# Altium PCB PCB1.PcbDoc
Units mil, origin at the board's own origin, x right, y up, seen from the top; angles counter-clockwise.
Board outline 1675 x 1025 mil, 2 copper layers (Top Layer, Bottom Layer); 28 components, 51 nets, 158 pads, 51 vias.
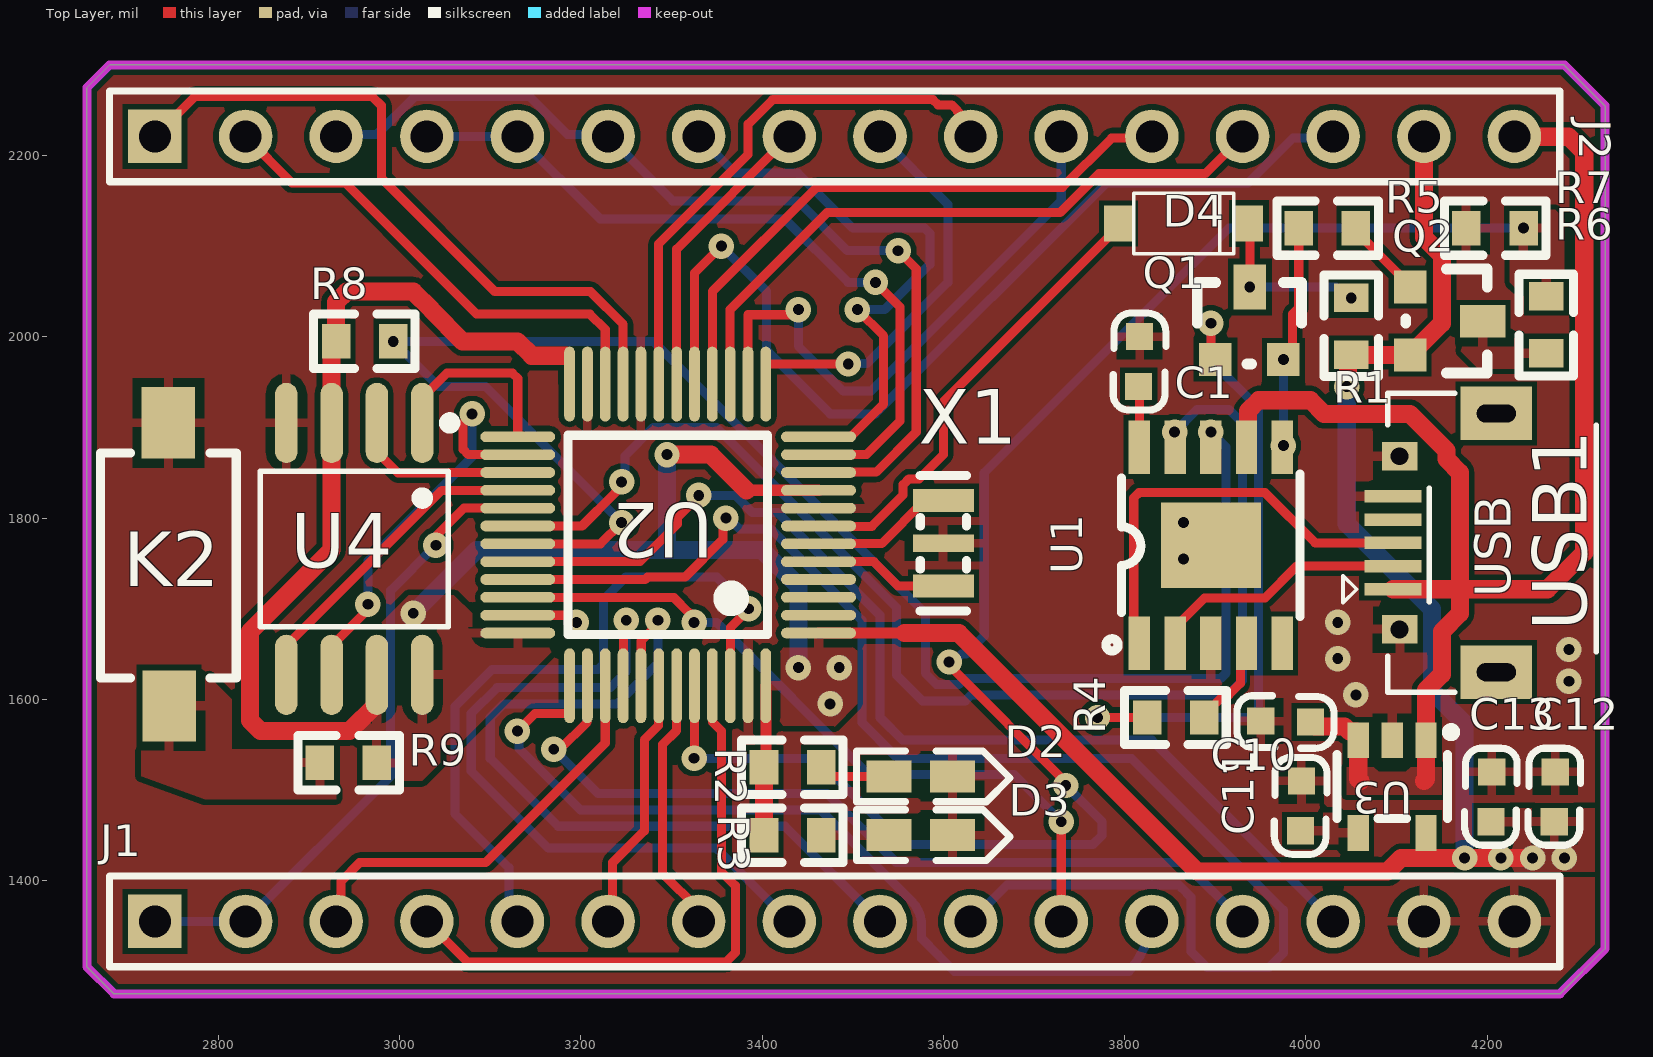
[diagram p0: Top Layer view]
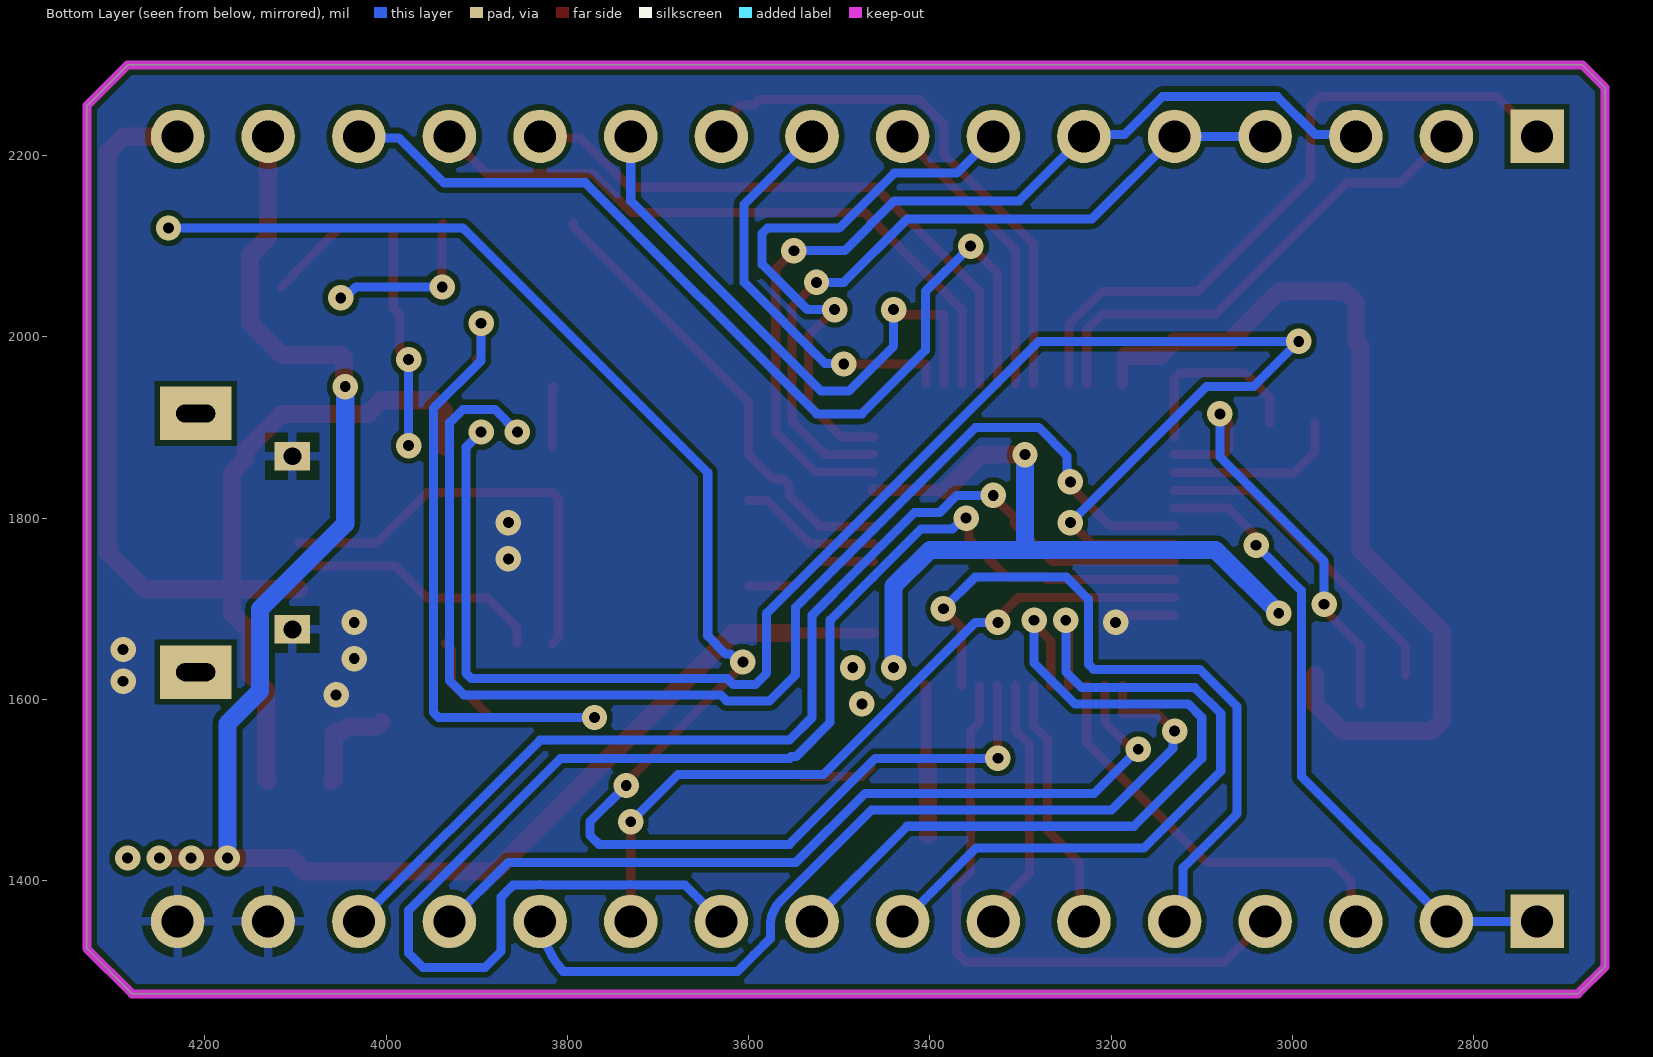
[diagram p1: Bottom Layer view, seen from below]

## Layer stack, top to bottom
Top Solder: solder mask 0.4, Solder Resist, Dk 3.5
Top Layer: signal copper 1.4
Dielectric 1: dielectric 12.6, FR-4, Dk 4.8
Bottom Layer: signal copper 1.4
Bottom Solder: solder mask 0.4, Solder Resist, Dk 3.5

## Board outline
2655,1305 2655,2275 2680,2300 4285,2300 4330,2255 4330,1325 4280,1275 2685,1275

## Design rules (kind name [scope] priority, off if disabled: settings)
Clearance [All] p1: gap=6 ignorepadtopadclearanceinfootprint=FALSE except(8: Arc-Arc Arc-Track Track-Track)
PolygonConnect [All] p1: thpad.connectstyle=Relief thpad.reliefconductorwidth=10 thpad.reliefentries=4 thpad.polygonreliefangle="90 Angle" thpad.airgapwidth=10 smdpad.connectstyle=Relief smdpad.reliefconductorwidth=10 smdpad.reliefentries=4 smdpad.polygonreliefangle="90 Angle" smdpad.airgapwidth=10 via.connectstyle=Direct via.reliefconductorwidth=10 via.reliefentries=4 via.polygonreliefangle="90 Angle" via.airgapwidth=10
RoomDefinition Sheet1 [InComponentClass('Sheet1')] p1: confinementstyle=ConfineIn formatcopy=TRUE lockcomponents=FALSE outline 7805,1110 13550,1110 13550,2830 7805,2830
RoutingVias [All] p1: holewidth=12 width=50 viastyle="Through Hole" minholewidth=12 minwidth=50 maxholewidth=12 maxwidth=50
SilkToSolderMaskClearance [IsPad] p1: minsilkscreentomaskgap=0 clearancetoexposedcopper=TRUE
SolderMaskExpansion [All] p1: expansion=4 istentingtop=FALSE
Width PWR [InNetClass('PWR')] p1: maxlimit=20 minlimit=20 preferedwidth=20
Width [All] p2: maxlimit=10 minlimit=10 preferedwidth=10
29 further rules are at their usual default settings.

## Classes and differential pairs
net class PWR: 3V3 5V

## Components (designator, comment, footprint, x,y, rotation, side; value= is the part's Value field where it differs from the comment)
C1 "100nF" 0603C 3815,1945 r90 top
C10 "105" 0603C 3949.79,1576.35 r0 top
C11 "223" 0603C 3995.35,1510.21 r270 top
C12 "104" 0603C 4275.35,1520.21 r270 top
C13 "106" 0603C 4205.35,1520.21 r270 top
D2 "LED" LED-0603G 3540,1514.74 r0 top
D3 "LED" LED-0603G 3540,1450 r0 top
D4 "B5819W SL" SOD-123 3795,2125 r0 top
J1 "Pin HDR1X16" "Pin HDR1X16/2.54mm-S" 2730,1355 r0 top
J2 "Pin HDR1X16" "Pin HDR1X16/2.54mm-S" 2730,2221.14 r0 top
K2 "KEY" SMD-3X6X2.5 2745,1595 r90 top
Q1 "SS8050 NPN" SOT-23 3935,2010 r0 top
Q2 "SS8050 PNP" SOT-23 4150,2020 r270 top
R1 "10K" 0603R 4050,2042.99 r270 top
R2 "1K" 0603R 3402.01,1525 r0 top
R3 "1K" 0603R 3402.01,1450 r0 top
R4 "1K" 0603R 3825,1580 r0 top
R5 "1K" 0603R 4055,2120 r180 top
R6 "1K" 0603R 4265,1982.01 r90 top
R7 "10K" 0603R 4240,2120 r180 top
R8 "1K" 0603R 2930,1995 r0 top
R9 "10K" 0603R 2975,1530 r180 top
U1 "CH340K" ESSOP-10 3816.26,1661.74 r0 top
U2 "STM32F103C8T6" "LQFP48 7X7" 3295.79,1781.42 r90 top
U3 "RT9193" RT9193-33GB 4057.59,1452.64 r90 top
U4 "W25Q64" SOIC-8 3025,1905 r180 top
USB1 "Micro-USB" USB-micro_B 4095.83,1721.54 r90 top
X1 "晶振" 8MHZ 3600,1725 r90 top

## Footprints (in the part's own frame and the unit in brackets; to place one, negate y for a bottom-side part, rotate by r counter-clockwise, add the part's x,y. Pads: shape width x height; smd on the part's side, far side on the other; paste and mask are expansions set on the pad)
8MHZ [mm]
  rect 0.65x1.7 smd: 1(0,0) 3(2.4,0)
  rect 0.5x1.7 smd: 2(1.2,0)
  silkscreen extent -0.7,-0.65 3.1,0.65
0603C [mil]
  rect 30x30 smd: 1(0.21,-0.35) 2(55.21,-1.35)
  silkscreen extent -26,-30 81,28, body extent -1,-15 62,17, height 12
0603R [mm]
  rect 0.8x0.965 smd: 1(0,0) 2(1.6,0)
  silkscreen extent -0.64,-0.76 2.21,0.76, body extent -0.04,-0.41 1.56,0.41, height 0.45
ESSOP-10 [mm] "CH341K"
  rect 0.6x1.5 smd: 1(0,0) 2(1,0) 3(2,0) 4(3,0) 5(4,0) 6(4,5.5) 7(3,5.5) 8(2,5.5) 9(1,5.5) 10(0,5.5)
  rect 2.8x2.4 smd: 11(2,2.75)
  silkscreen extent -0.94,-0.21 4.5,4.75
LED-0603G [mil]
  rect 50x35 smd: A(0,0.26) K(70,0.26)
  silkscreen extent -36,-28 134,28, body extent 4,-15 66,17, height 24
"LQFP48 7X7" [mm]
  oval 0.3x2.1 smd: 1(-2.75,-4.227) 2(-2.25,-4.227) 3(-1.75,-4.227) 4(-1.25,-4.227) 5(-0.75,-4.227) 6(-0.25,-4.227) 7(0.25,-4.227) 8(0.75,-4.227) 9(1.25,-4.227) 10(1.75,-4.227) 11(2.25,-4.227) 12(2.75,-4.227) 25(2.75,4.202) 26(2.25,4.202) 27(1.75,4.202) 28(1.25,4.202) 29(0.75,4.202) 30(0.25,4.202) 31(-0.25,4.202) 32(-0.75,4.202) 33(-1.25,4.202) 34(-1.75,4.202) 35(-2.25,4.202) 36(-2.75,4.202)
  oval 2.1x0.3 smd: 13(4.227,-2.75) 14(4.227,-2.25) 15(4.227,-1.75) 16(4.227,-1.25) 17(4.227,-0.75) 18(4.227,-0.25) 19(4.227,0.25) 20(4.227,0.75) 21(4.227,1.25) 22(4.227,1.75) 23(4.227,2.25) 24(4.227,2.75) 37(-4.227,2.75) 38(-4.227,2.25) 39(-4.227,1.75) 40(-4.227,1.25) 41(-4.227,0.75) 42(-4.227,0.25) 43(-4.227,-0.25) 44(-4.227,-0.75) 45(-4.227,-1.25) 46(-4.227,-1.75) 47(-4.227,-2.25) 48(-4.227,-2.75)
  silkscreen extent -2.79,-2.79 2.79,2.79, body extent -4.51,-4.5 4.5,4.5, height 1.45
"Pin HDR1X16/2.54mm-S" [mm]
  rect 1.5x1.5 hole 0.9: 1(0,0)
  round 1.5 hole 0.9: 2(2.54,0) 3(5.08,0) 4(7.62,0) 5(10.16,0) 6(12.7,0) 7(15.24,0) 8(17.78,0) 9(20.32,0) 10(22.86,0) 11(25.4,0) 12(27.94,0) 13(30.48,0) 14(33.02,0) 15(35.56,0) 16(38.1,0)
  silkscreen extent -1.27,-1.27 39.37,1.27, body extent -1.27,-1.27 39.37,1.27, height 7.58
RT9193-33GB [mm]
  rect 1x0.6 smd: 1(2.6,-1.9) 2(2.6,-0.95) 3(2.6,0) 4(0,0) 5(0,-1.9)
  silkscreen extent 0.4,-2.73 2.95,0.6
SMD-3X6X2.5 [mm]
  rect 2x1.5 smd: 1(-0.059,-0.02) 3(7.874,0)
  silkscreen extent 0.73,-1.9 7.03,1.9, body extent -0.19,-1.78 7.81,1.72, height 2.59
SOD-123 [mm] "塑封二极管"
  rect 0.8x1 smd: A(-0.051,0) K(3.607,0)
  silkscreen extent 0.38,-0.85 3.18,0.85, body extent -0.12,-0.89 3.73,0.81, height 1.43
SOIC-8 [mm] "W25Q64"
  oval 0.63x2.25 smd: 1(0,0) 2(1.27,0) 3(2.54,0) 4(3.81,0) 5(3.81,7.06) 6(2.54,7.06) 7(1.27,7.06) 8(0,7.06)
  silkscreen extent -0.92,-0.15 4.54,5.71
SOT-23 [mil]
  rect 36x36 smd: B(-35,-35) E(40,-35)
  rect 36x50 smd: C(3,45)
  silkscreen extent -55,-40 60,50, body extent -54,-48 60,62, height 47
USB-micro_B [mm]
  rect 1.5x2 hole 0.5 slot 1.1 at 90 deg: 0(-2.325,-2.9) 0(4.925,-2.9)
  rect 0.35x1.6 smd: 1(0,0) 2(0.65,0) 3(1.3,0) 4(1.95,0) 5(2.6,0)
  rect 0.8x1 hole 0.5: 5(-1.125,-0.19) 5(3.725,-0.19)
  silkscreen extent -2.89,-5.69 5.49,1.4, body extent -2.7,-5.6 5.3,0, height 2.8

## Part data
C1 C10 C11 C12 C13: library part CAP, "无极性电容"
D4: library part DIODE, "普通二极管"
Q1: library part NPN, "NPN三极管"
Q2: library part PNP, "PNP三极管"
R1 R2 R3 R4 R5 R6 R7 R8 R9: library part RES
X1: library part 8MHZ

## Via types
v1: diameter 28, hole 12, Top Layer to Bottom Layer, tented both sides, 51 vias

## Nets (pads, with @x,y where several pads share a name; then routed paths per layer and width w, separated by ;. In a path a pad name is that pad's centre, name@x,y a point inside that pad or via, vN(x,y) a via of type N, cw(c..) or ccw(c..) an arc to the next point about the centre after c; other vN are vias at no path point)
3V3: C12.2 C13.2 J2.15 Q2.E R1.2 R2.1 R3.1 R8.1 R9.1 U2.1 U2.9 U2.24 U2.36 U2.48 U3.5 U4.3 U4.7 U4.8 | length 3868.8
  Top Layer w12: U2.24@3183.43,1979.17 3187.52,1975.08 U2.24 ; R2.1@3404.06,1527.05 U2.48 ; U2.1 3556.85,1673.15
  Top Layer w13: 3382.62,1830.63 U2.9
  Top Layer w20: U4.7 2975,1595.16 2944.84,1565 2846.72,1565 2835,1576.71 2835,1675 2925,1765 U4.3 2925,1990 R8.1 2930,2038.28 2941.72,2050 3015,2050 3035,2030 3035,2029.64 3069.64,1995 3130,1995 3145.83,1979.17 U2.24@3183.43,1979.17 ; v1(3295,1870) 3343.25,1870 3382.62,1830.63 ; R3.1 R2.1 R2.1@3404.06,1527.05 ; 3556.85,1673.15 3616.85,1673.15 3880,1410 4090,1410 4105,1425 v1(4175,1425) v1(4215,1425) v1(4250,1425) ; v1(4045,1945) 4046.53,1946.53 4046.53,1976.53 R1.2 Q2.E 4150,2015 4150,2089.64 4130,2109.64 J2.15
  Bottom Layer w20: v1(3015,1695) 3085,1765 3295,1765 ; v1(3295,1870) 3295,1765 ; v1(3440,1635) 3440,1725 3400,1765 3295,1765 ; v1(4045,1945) 4045,1793.61 4138.99,1699.62 4138.99,1609.48 4175,1573.47 v1(4175,1425)
  other v1: 4285,1425 3475,1595 3485,1635
5V: C10.2 J2.16 U1.7 U3.1 U3.3 USB1.1 | length 1539.9
  Top Layer w20: U1.7 3936.18,1880.08 3936.18,1918.28 3947.9,1930 4005,1930 4020,1915 4114.56,1915 4155,1874.56 4155,1865 4170,1850 4170,1721.54 ; C10.2 4010,1570 4042.6,1570 4047.91,1564.69 4055.79,1564.69 4057.6,1562.88 U3.3 4057.6,1512.4 4060,1510 ; USB1.1 4170,1721.54 ; 4130,1510 4132.4,1512.4 U3.1 4132.4,1610.14 4150,1627.74 4150,1675 4170,1695 4170,1721.54 ; J2.16 4230.39,2220.76 4289.53,2220.76 4307,2203.28 4307,1762 4266.54,1721.54 4170,1721.54
BOOT0: R6.2 R7.1 U2.44 | length 1772.2
  Top Layer w10: v1(3325,1535) 3325.16,1535.16 3325.16,1614.84 U2.44 ; v1(3606.29,1641.29) 3606.29,1637.5 3735,1508.79 v1(3735,1505)
  Bottom Layer w10: v1(3325,1535) 3460,1535 3555,1440 3765,1440 3775,1450 3775,1465 v1(3735,1505) ; v1(3606.29,1641.29) 3611.16,1641.29 3619.87,1650 3625,1650 3645,1670 3645,1850 3915,2120 v1(4240,2120)
GND: C1.2 C10.1 C11.1 C12.1 C13.1 D2.K D3.K J1.15 J1.16 K2.3 R7.2 U1.3 U1.11 U2.8 U2.20 U2.23 U2.35 U2.47 U3.2 U4.4 USB1.5 X1.2 | length 67.9
  Top Layer w10: U2.35 3187.17,1692.83 v1(3195,1685)
  other v1: 4055,1605 4290,1620 4035,1645 4290,1655 4035,1685 3865,1755 3865,1795
NetC1_1: C1.1 U1.10 | length 67.3
  Top Layer w10: C1.1 3816.26,1944.31 U1.10
NetC11_2: C11.2 U3.4
NetD2_A: D2.A R2.2 | length 79.1
  Top Layer w10: R2.2 3475,1515 D2.A
NetD3_A: D3.A R3.2
NetD4_K: D4.K Q1.C R1.1 | length 187.4
  Top Layer w10: D4.K 3938,2124 v1(3938,2055)
  Bottom Layer w10: v1(3938,2055) 4033.12,2055 4045.13,2042.99 v1(4050,2042.99)
NetK2_1: K2.1 R9.2
NetQ1_B: Q1.B R4.1 | length 728.2
  Top Layer w10: v1(3770,1580) R4.1 ; v1(3895,2015) 3895,1980 Q1.B
  Bottom Layer w10: v1(3770,1580) 3941.89,1580 3947.75,1585.86 3947.75,1921.14 3895,1973.88 v1(3895,2015)
NetQ1_E: Q1.E R5.2 U1.6 | length 248.8
  Top Layer w10: Q1.E@3973.74,1973.74 v1(3975,1975) 3985,1985 3985,2025 3992.01,2032.01 R5.2
  Bottom Layer w10: v1(3975,1880) v1(3975,1975)
NetQ2_B: Q2.B R5.1 | length 89.9
  Top Layer w10: R5.1 4055,2116.75 4102,2069.75 4102,2068 Q2.B
NetQ2_C: Q2.C R6.1
NetR4_2: R4.2 U1.4 | length 104
  Top Layer w10: R4.2 3887.99,1583.25 3909.74,1605 3915,1605 3927.56,1617.56 3927.56,1654.92 U1.4
PA0: J2.3 J2.6 U2.10 | length 1043.2
  Top Layer w10: U2.10 3462.55,1850.66 3525.66,1850.66 3570,1895 3570,2075 v1(3550,2095)
  Bottom Layer w10: J2.3 2931.84,2222.98 2974.53,2222.98 3016.54,2265 3143.46,2265 3185.47,2222.98 3228.16,2222.98 J2.6 3301.14,2150 3439.06,2150 3494.06,2095 v1(3550,2095)
PA1: J2.4 J2.5 U2.11 | length 831.1
  Top Layer w10: U2.11 3515,1870 3552,1907 3552,2033 v1(3525,2060)
  Bottom Layer w10: J2.4 J2.5 3221.14,2130 3425,2130 3495,2060 v1(3525,2060)
PA2: J2.7 U2.12 | length 637.1
  Top Layer w10: U2.12 3497.64,1889.68 3527.95,1920 3528.14,1920 3534,1925.86 3534,2001 v1(3505,2030)
  Bottom Layer w10: J2.7 3370.53,2180.61 3439.39,2180.61 3500,2120 3579.14,2120 3585,2114.14 3585,2080 3535,2030 v1(3505,2030)
PA3: J2.9 U2.13 | length 452.1
  Top Layer w10: U2.13 3404.06,1969.16 3404.89,1970 v1(3495,1970)
  Bottom Layer w10: v1(3495,1970) 3495.51,1970.51 3515.51,1970.51 3605,2060 3605,2146.14 J2.9
PA4: J2.11 U2.14 | length 643.5
  Top Layer w10: U2.14 3384.37,2024.37 3434.37,2024.37 v1(3440,2030)
  Bottom Layer w10: v1(3440,2030) 3440,1989.64 3489.64,1940 3520,1940 3730,2150 J2.11
PA5: J2.13 U2.15 | length 726.7
  Top Layer w10: U2.15 3364.68,2030.14 3471.54,2137 3728.63,2137 3771.63,2180 3888.86,2180 J2.13
PA6: J2.12 U2.16 | length 658.1
  Top Layer w10: U2.16 3345,2050 3460,2165 3731.17,2165 3785.47,2219.3 3828.16,2219.3 J2.12
PA7: J2.14 U2.17 | length 1081
  Top Layer w10: U2.17 3325.31,2070.31 v1(3355,2100)
  Bottom Layer w10: v1(3355,2100) 3405,2050 3405,1985 3475,1915 3525,1915 3780,2170 3936.17,2170 3985.47,2219.3 4028.16,2219.3 J2.14
PA8: J1.1 J1.2 U2.29 | length 715.2
  Top Layer w10: v1(3040,1770) 3040,1780 3070.94,1810.94 U2.29
  Bottom Layer w10: J1.1 J1.2 2990,1515 2990,1720 v1(3040,1770)
PA9: U1.9 U2.30 | length 1415.7
  Top Layer w10: U2.30 3201.26,1791.26 3236.99,1826.99 3236.99,1827.12 3245,1835.13 v1(3245,1840)
  Bottom Layer w10: v1(3245,1840) 3248.44,1843.44 3248.44,1868.44 3280,1900 3349.54,1900 3548,1701.54 3548,1627 3576.71,1598.29 3624.1,1598.29 3630.81,1605 3914.14,1605 3929.75,1620.6 3929.75,1905.25 3915,1920 3880,1920 v1(3855,1895)
PA10: R8.2 U1.8 U2.31 | length 1851.8
  Top Layer w10: U2.31 3221.57,1771.57 v1(3245,1795)
  Bottom Layer w10: v1(3245,1795) 3095,1945 3042.99,1945 v1(2992.99,1995) 3280,1995 3580,1695 3580,1628.86 3592.57,1616.29 3616.64,1616.29 3623.36,1623 3905.89,1623 3911.75,1628.86 3911.75,1878.25 v1(3895,1895)
PA11: J1.14 U2.32 | length 1195.6
  Top Layer w10: U2.32 3265.14,1751.89 3306.55,1793.3 3306.55,1800.37 3330,1823.82 v1(3330,1825)
  Bottom Layer w10: v1(3330,1825) 3370.36,1825 3389.36,1806 3416.98,1806 3481,1741.98 3530,1692.98 3530,1580 3555,1555 3830,1555 J1.14
PA12: J1.10 U2.33 | length 1618.2
  Top Layer w10: U2.33 3270.91,1732.2 3273.71,1735 3315,1735 3356.56,1776.56 3356.56,1796.56 v1(3360,1800)
  Bottom Layer w10: v1(3360,1800) 3362.86,1800 3374.86,1788 3409.53,1788 3463,1734.53 3510,1687.53 3510,1574.54 3547.54,1537 3553,1537 3555,1535 3807.31,1535 3975,1367.31 3975,1320 3959.14,1304.14 3890.86,1304.14 3873.04,1321.96 3873.04,1381.96 3862.93,1392.07 3860,1395 3836.52,1395 ccw(c3830,1355) 3823.48,1395 3736.52,1395 ccw(c3730,1355) 3723.48,1395 3670,1395 J1.10
PA13: J1.11 U2.34 | length 815.1
  Top Layer w10: U2.34 3130.6,1712.29 3302.71,1712.29 3309.78,1705.22 3309.78,1705.09 3325,1689.87 v1(3325,1685) ; J1.11 v1(3730,1465)
  Bottom Layer w10: v1(3325,1685) 3349.65,1685 3517.64,1517 3678,1517 v1(3730,1465)
PA14: J1.12 U2.37 | length 967.8
  Top Layer w10: v1(3130,1565) 3149.57,1584.57 3186.68,1584.57 3187.52,1585.4 U2.37
  Bottom Layer w10: v1(3130,1565) 3131.77,1563.23 3131.77,1545.75 3196.59,1480.93 3199.52,1478 3464.31,1478 3564.3,1378.02 cw(c3535.83,1349.43) 3575.84,1354.57 3575.84,1336.15 3593.69,1318.29 3612.07,1299.92 3638.05,1299.92 3638.14,1299.92 3804.49,1299.92 ccw(c3726.53,1369.47) J1.12
PA15: J1.13 U2.38 | length 928.1
  Top Layer w10: v1(3170,1545) 3176.86,1545 3206.86,1575 3206.86,1614.65 U2.38
  Bottom Layer w10: v1(3170,1545) 3219,1496 3471.77,1496 3547.77,1420 3865,1420 J1.13
PB0: J2.8 U2.18 | length 324.8
  Top Layer w10: U2.18 3305.63,2096.77 J2.8
PB1: J2.10 U2.19 | length 609.4
  Top Layer w10: U2.19 3285.6,1948.18 3285.6,2102.2 3384.6,2201.2 3384.6,2234.6 3411.67,2261.67 3588.33,2261.67 3594.19,2255.81 3609.14,2255.81 3615,2249.95 3615,2249.42 3630,2234.42 J2.10
PB3: J1.3 U2.39 | length 464.5
  Top Layer w10: J1.3 2935.39,1360.39 2935.39,1399.53 2955.86,1420 3095,1420 3226.89,1551.89 U2.39
PB4: J1.8 U2.40 | length 803.7
  Top Layer w10: U2.40 3246.92,1615.35 3246.92,1684.21 v1(3250,1687.29)
  Bottom Layer w10: v1(3250,1687.29) 3250,1630.46 3232.54,1613 3107.54,1613 3079.08,1584.53 3079.08,1520.92 3164.14,1435.86 3349.14,1435.86 J1.8
PB5: J1.9 U2.41 | length 886.7
  Top Layer w10: U2.41 3266.61,1615.35 3266.61,1664.67 3285,1683.06 v1(3285,1687.29)
  Bottom Layer w10: v1(3285,1687.29) 3285,1640 3240,1595 3115,1595 3100,1580 3100,1535 3175,1460 3425,1460 J1.9
PB6: J1.6 U2.42 | length 283.2
  Top Layer w10: J1.6 3235,1360 3235,1420 3270,1455 3270,1555.46 3285.6,1571.05 3285.6,1614.65 U2.42
PB7: J1.7 U2.43 | length 283
  Top Layer w10: U2.43 3305.63,1565.63 3290,1550 3290,1408.27 3330,1368.27 J1.7
PB8: J1.4 U2.45 | length 668.6
  Top Layer w10: J1.4 3075,1310 3360,1310 3370.53,1320.53 3370.53,1394.47 3355,1410 3355,1565.34 3345.35,1575 3345.35,1614.65 U2.45
PB9: J1.5 U2.46 | length 798.5
  Top Layer w10: U2.46 3364.84,1615.16 3364.84,1679.15 3385,1699.3 v1(3385,1700)
  Bottom Layer w10: J1.5 3120.61,1364.39 3120.61,1414.39 3061.08,1473.92 3061.08,1591.99 3102.23,1633.14 3219.14,1633.14 3225,1639 3225,1710.48 3249.52,1735 3350,1735 v1(3385,1700)
PB10: J2.1 U2.21 | length 751.7
  Top Layer w10: J2.1 2773.86,2265 2970,2265 2980,2255 2980,2175 3105,2050 3210.46,2050 3246.57,2013.88 U2.21
PB11: J2.2 U2.22 | length 545.4
  Top Layer w10: J2.2 2881.14,2170 2940,2170 3085,2025 3210,2025 3226.89,2008.11 U2.22
PB12: U2.25 U4.1 | length 211.3
  Top Layer w10: U4.1 3025,1932.79 3052.21,1960 3124.51,1960 3130.37,1954.14 U2.25
PB13: U2.26 U4.6 | length 490.1
  Top Layer w10: U4.6@2925,1595.16 U4.6 2925,1658.94 2965,1698.94 v1(2965,1705) ; v1(3080,1915) 3070,1905 3070,1875.86 3075.86,1870 U2.26
  Bottom Layer w10: v1(2965,1705) 2965,1752.5 3080,1867.5 v1(3080,1915)
PB14: U2.27 U4.2 | length 197.2
  Top Layer w10: U4.2 2975,1873.11 2998.4,1849.71 3054.4,1849.71 3055.01,1850.32 U2.27
PB15: U2.28 U4.5 | length 358.4
  Top Layer w10: U4.5 2875,1658.94 3046.69,1830.63 U2.28
RST: D4.A U2.7 | length 512.3
  Top Layer w10: U2.7 3462.55,1790.91 3520.91,1790.91 3555.54,1825.54 3555.54,1836.83 3561.99,1843.28 3573.28,1843.28 3600,1870 3600,1928.06 3793,2121.06 D4.A
USBD+: U1.1 USB1.3 | length 474.5
  Top Layer w10: U1.1 3810,1668 3810,1822.39 3815.86,1828.24 3954.67,1828.24 4010.2,1772.72 USB1.3
USBD-: U1.2 USB1.2 | length 285.9
  Top Layer w10: U1.2 3855.63,1679.45 3887.93,1711.76 3954.67,1711.76 3990.04,1747.13 USB1.2
XTAL1: U2.5 X1.1 | length 148.9
  Top Layer w10: U2.5 3523.11,1751.89 3550,1725 X1.1
XTAL2: U2.6 X1.3 | length 157.6
  Top Layer w10: U2.6 3462.55,1771.92 3531.78,1771.92 3579.34,1819.48 X1.3
pads on no net: U1.5 U2.2 U2.3 U2.4 USB1.0 USB1.4

## Polygon pours and split planes (outlines as drawn)
GND on Top Layer "GND_L01_P027" (solid, pour order 27): 2685,1275 4280,1275 4330,1325 4330,2255 4285,2300 2680,2300 2655,2275 2655,1305
3V3 on Top Layer "3V3_L01_P007" (solid, pour order 7): 4090,1410 4320,1410 4320,1480 4090,1480
NetQ2_C on Top Layer "NETQ2_C_L01_P001" (solid, pour order 1): 4170,2035 4170,1985 4190,1965 4290,1965 4290,2000 4240,2000 4220,2020 4220,2035
BOOT0 on Top Layer "BOOT0_L01_P002" (solid, pour order 2): 4225,2140 4225,2060 4245,2040 4245,2030 4285,2030 4285,2130 4275,2140
5V on Top Layer "5V_L01_P006" (solid, pour order 6): 4045,1575 4045,1495 4150,1495 4150,1575 4120,1575 4120,1530 4110,1520 4080,1520 4070,1530 4070,1575
NetC11_2 on Top Layer "NETC11_2_L01_P013" (solid, pour order 13): 3980,1440 4040,1440 4050,1430 4070,1430 4070,1475 3980,1475
NetD3_A on Top Layer "NETD3_A_L01_P015" (solid, pour order 15): 3450,1470 3450,1430 3570,1430 3570,1470
3V3 on Top Layer "3V3_L01_P018" (solid, pour order 18): 2960,1510 2960,1665 2970,1675 3045,1675 3045,1530 3025,1510
NetK2_1 on Top Layer "NETK2_1_L01_P021" (solid, pour order 21): 2715,1630 2715,1515 2785,1490 2825,1490 2930,1490 2930,1545 2815,1545 2815,1600 2785,1630
3V3 on Top Layer "3V3_L01_P023" (solid, pour order 23): 3170,1680 3170,1655 3065,1550 2997.5,1550 2960,1587.5 2960,1665 2975,1680 3080,1680
3V3 on Top Layer "3V3_L01_P024" (solid, pour order 24): 3420,1680 3505,1680 3505,1595 3480,1570 3478.98,1571.02 3404.06,1571.02 3404.06,1650.94 3400,1655
3V3 on Top Layer "3V3_L01_P025" (solid, pour order 25): 2975,1680 3010,1715 3060,1715 3080,1695 3080,1680
GND on Bottom Layer "GND_L02_P028" (solid, pour order 28): 2685,1275 2655,1305 2655,2275 2680,2300 4285,2300 4330,2255 4330,1325 4280,1275

## Keep-outs
Keep-Out Layer:
  the board outline again, w10

## Text inside footprints (layer, text, board x,y; h text height)
USB1: Top Overlay "USB" at 4225.83,1712.72 h40 r90